# Altium PCB CATS-Vega-Nutzen.PcbDoc
Units mm, origin at the board's own origin, x right, y up, seen from the top; angles counter-clockwise.
Board outline 110 x 196 mm, 6 copper layers (Top Layer, Mid Layer 1 (GND), Mid Layer 2 (Sig), Mid Layer 3 (PWR), Mid Layer 4 (GND), Bottom Layer), stack 1.538 mm thick; 4 components, 0 nets, 4 pads, 0 vias.
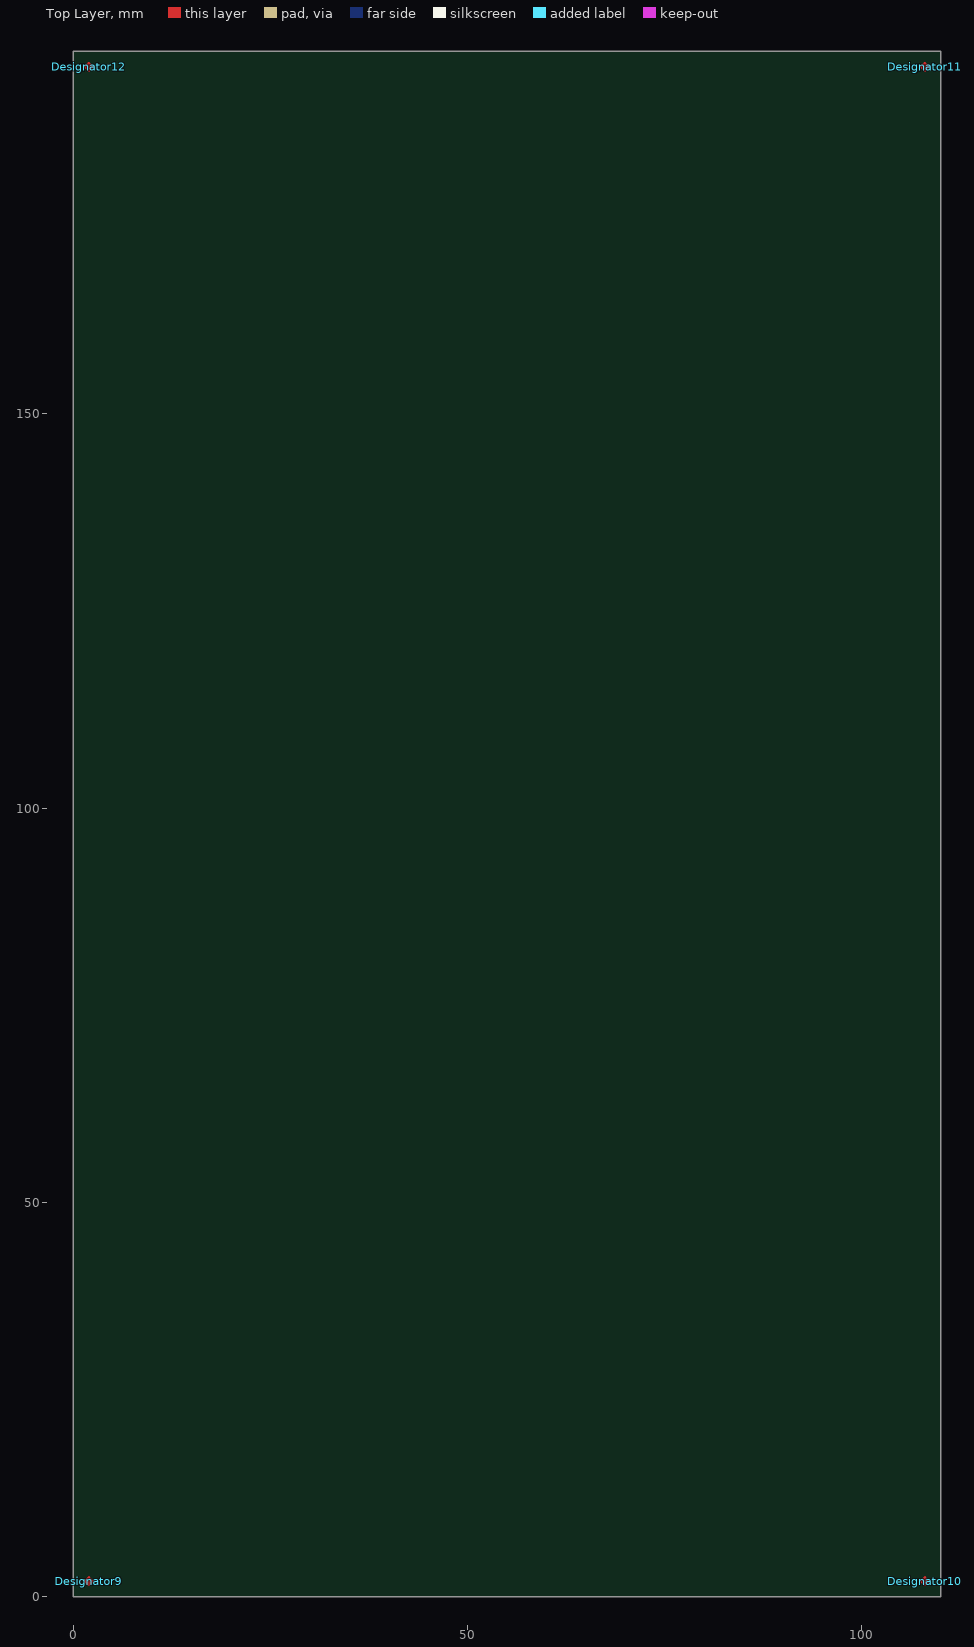
[diagram p0: Top Layer view]
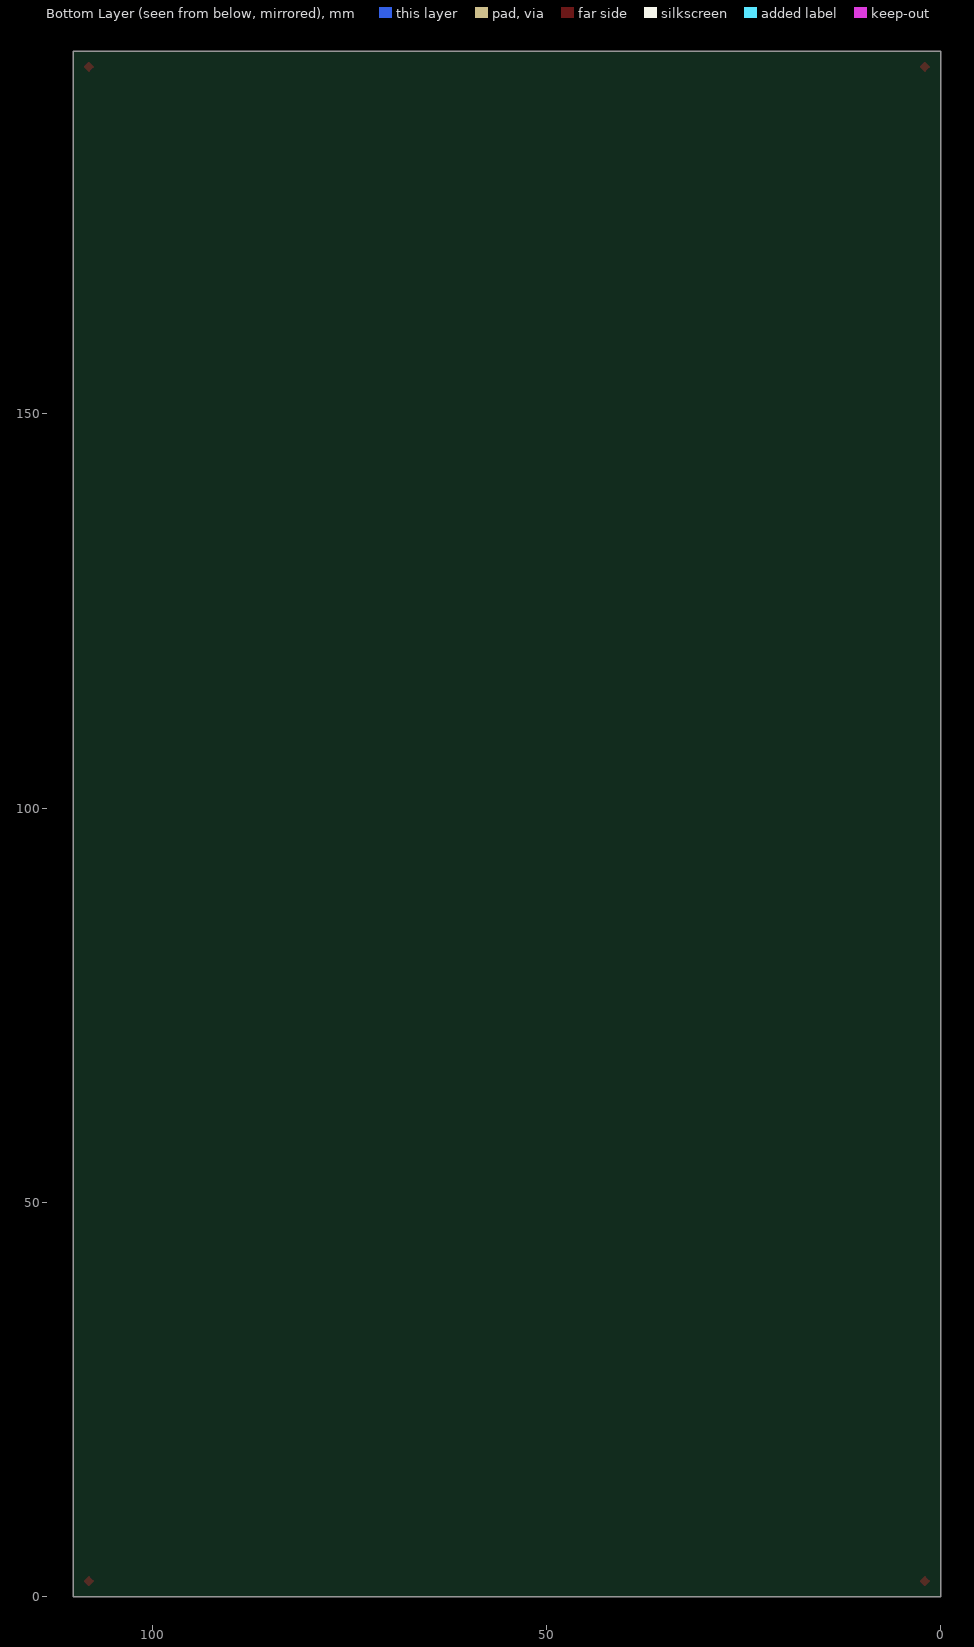
[diagram p1: Bottom Layer view, seen from below]

## Layer stack, top to bottom
Top Solder: solder mask 0.0127, Solder Resist, Dk 3.8
Top Layer: signal copper 0.035
Dielectric 1: prepreg 0.0994, 3313, Dk 4.05
Mid Layer 1 (GND): signal copper 0.0152
Core 1: core 0.55, FR-4, Dk 4.6
Mid Layer 2 (Sig): signal copper 0.0152
Dielectric 2: prepreg 0.1088, 2116, Dk 4.25
Mid Layer 3 (PWR): signal copper 0.0152
Core 2: core 0.55, FR-4, Dk 4.5
Mid Layer 4 (GND): signal copper 0.0152
Dielectric 3: prepreg 0.0994, 3313, Dk 4.05
Bottom Layer: signal copper 0.035
Bottom Solder: solder mask 0.0127, Solder Resist, Dk 3.8

## Board outline
0,0 0,196 110,196 110,0

## Design rules (kind name [scope] priority, off if disabled: settings)
Clearance [All] p1: gap=0.254 ignorepadtopadclearanceinfootprint=FALSE except(0: Arc-Hole Track-Hole SMDPad-Hole THPad-Hole Via-Hole Fill-Hole Poly-Hole Region-Hole Text-Hole)
PolygonConnect [All] p1: connectstyle=Relief reliefconductorwidth=0.254 reliefentries=4 polygonreliefangle="90 Angle" airgapwidth=0.254
RoutingVias [All] p1: holewidth=0.711 width=1.27 viastyle="Through Hole" minholewidth=0.711 minwidth=1.27 maxholewidth=0.711 maxwidth=1.27
SolderMaskExpansion [All] p1: expansion=0.102 istentingtop=FALSE
Width [All] p1: maxlimit=0.254 minlimit=0.254 preferedwidth=0.254
30 further rules are at their usual default settings.

## Components (designator, comment, footprint, x,y, rotation, side; value= is the part's Value field where it differs from the comment)
Designator9 "Comment" Referenzmarke 2,2 r0 top
Designator10 "Comment" Referenzmarke 108,2 r0 top
Designator11 "Comment" Referenzmarke 108,194 r0 top
Designator12 "Comment" Referenzmarke 2,194 r0 top

## Footprints (in the part's own frame and the unit in brackets; to place one, negate y for a bottom-side part, rotate by r counter-clockwise, add the part's x,y. Pads: shape width x height; smd on the part's side, far side on the other; paste and mask are expansions set on the pad)
Referenzmarke [mm] "Referenzmarke für SMD-Automat"
  round 0.1 smd mask+0: 0(0,0)
  Top Layer region: 0,-0.5 0.5,0 0,0.5 -0.5,0
  Top Layer lines w0.254: -0.5,0 0,-0.5 0.5,0 0,0.5 -0.5,0

## Nets (pads, with @x,y where several pads share a name; then routed paths per layer and width w, separated by ;. In a path a pad name is that pad's centre, name@x,y a point inside that pad or via, vN(x,y) a via of type N, cw(c..) or ccw(c..) an arc to the next point about the centre after c; other vN are vias at no path point)
pads on no net: Designator9.0 Designator10.0 Designator11.0 Designator12.0

## Silkscreen, mask and mechanical layers (free items; w line width, h text height)
Mechanical 1:
  drawing of 191 lines, arcs and shapes, not listed

## Panel: embedded boards
"CATS-Vega.PcbDoc" at 5,5, 5 rows x 1 columns, spacing 38 x 105, rotation 0